# Altium PCB MD017A ISO-F28027F.PcbDoc (part 1 of 2)
Units mil, origin at the board's own origin, x right, y up, seen from the top; angles counter-clockwise.
Board outline 2600 x 2000 mil, 2 copper layers (Top, Bottom), stack 61.811 mil thick; 81 components, 98 nets, 369 pads, 191 vias.
Unrouted connection lines stored in the file: 2.
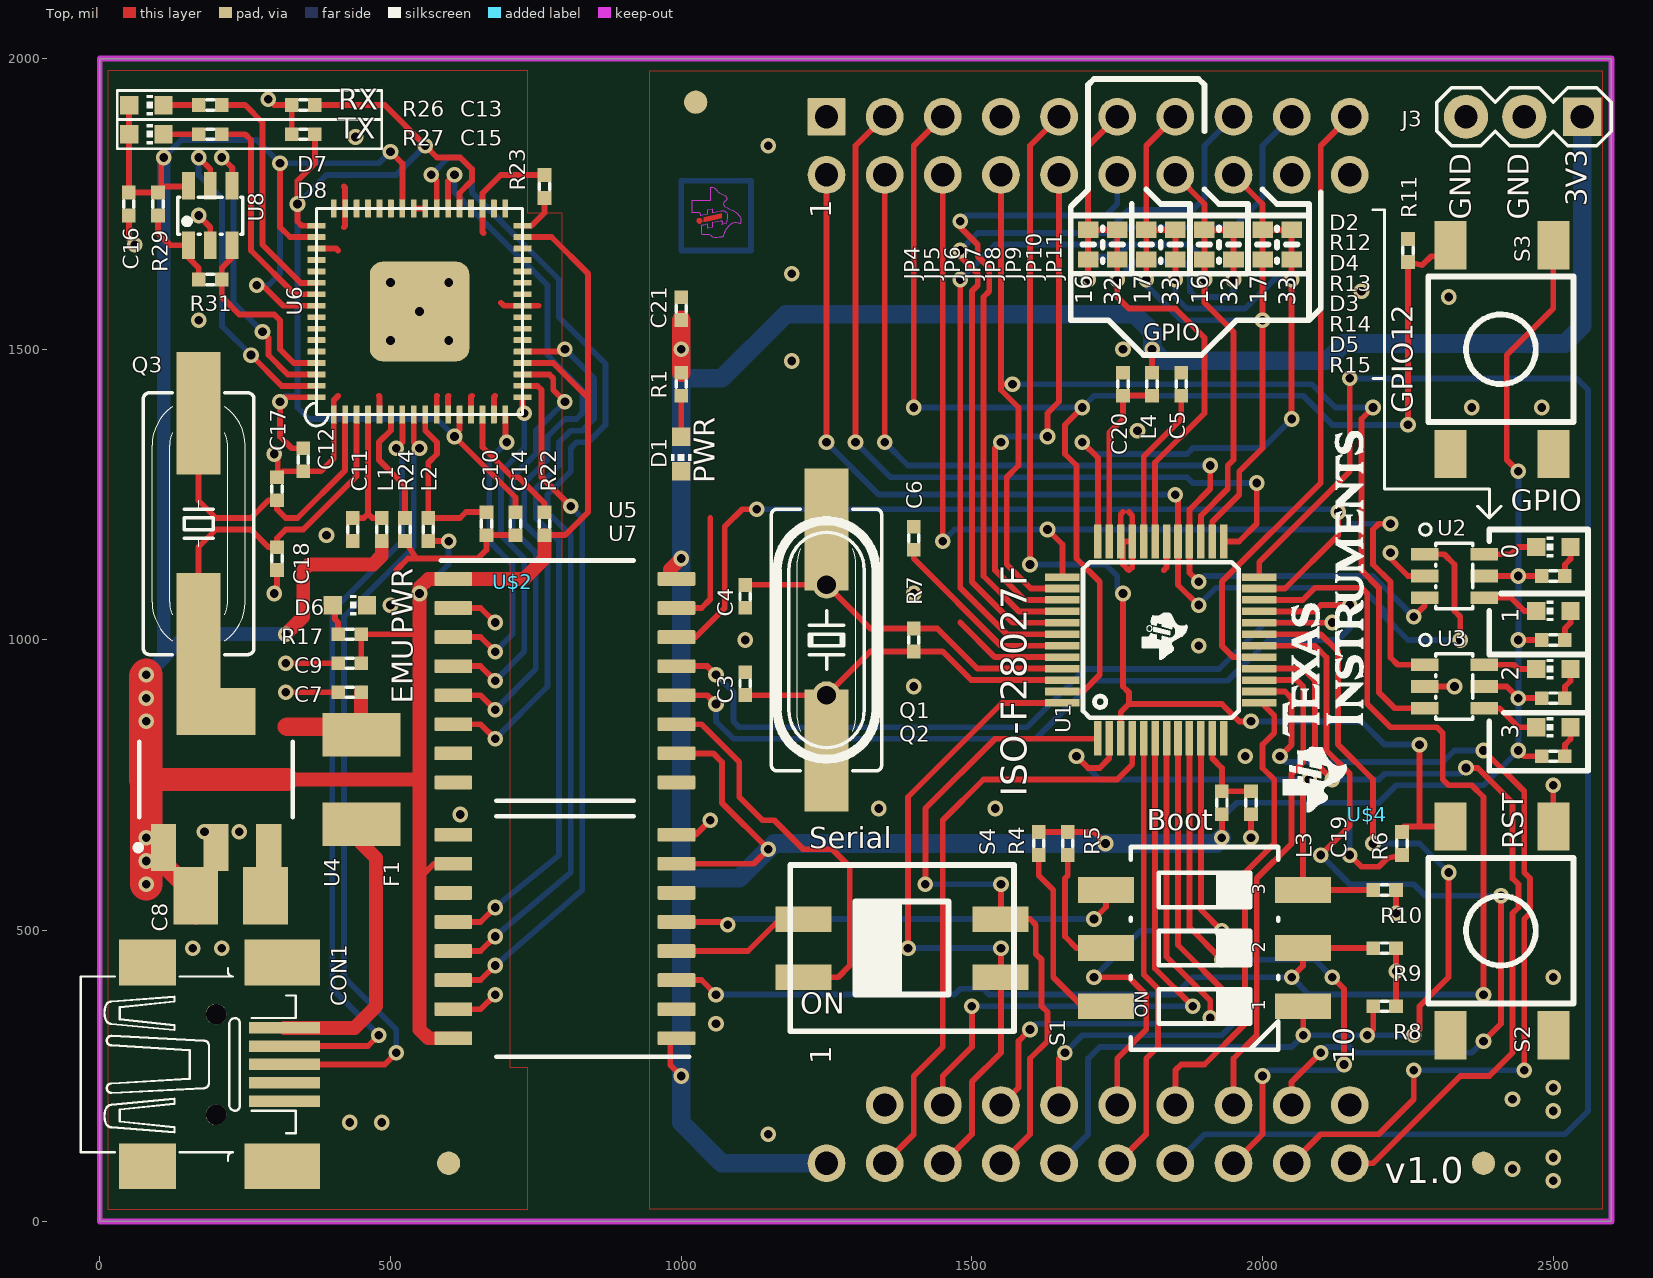
[diagram p0: Top view]
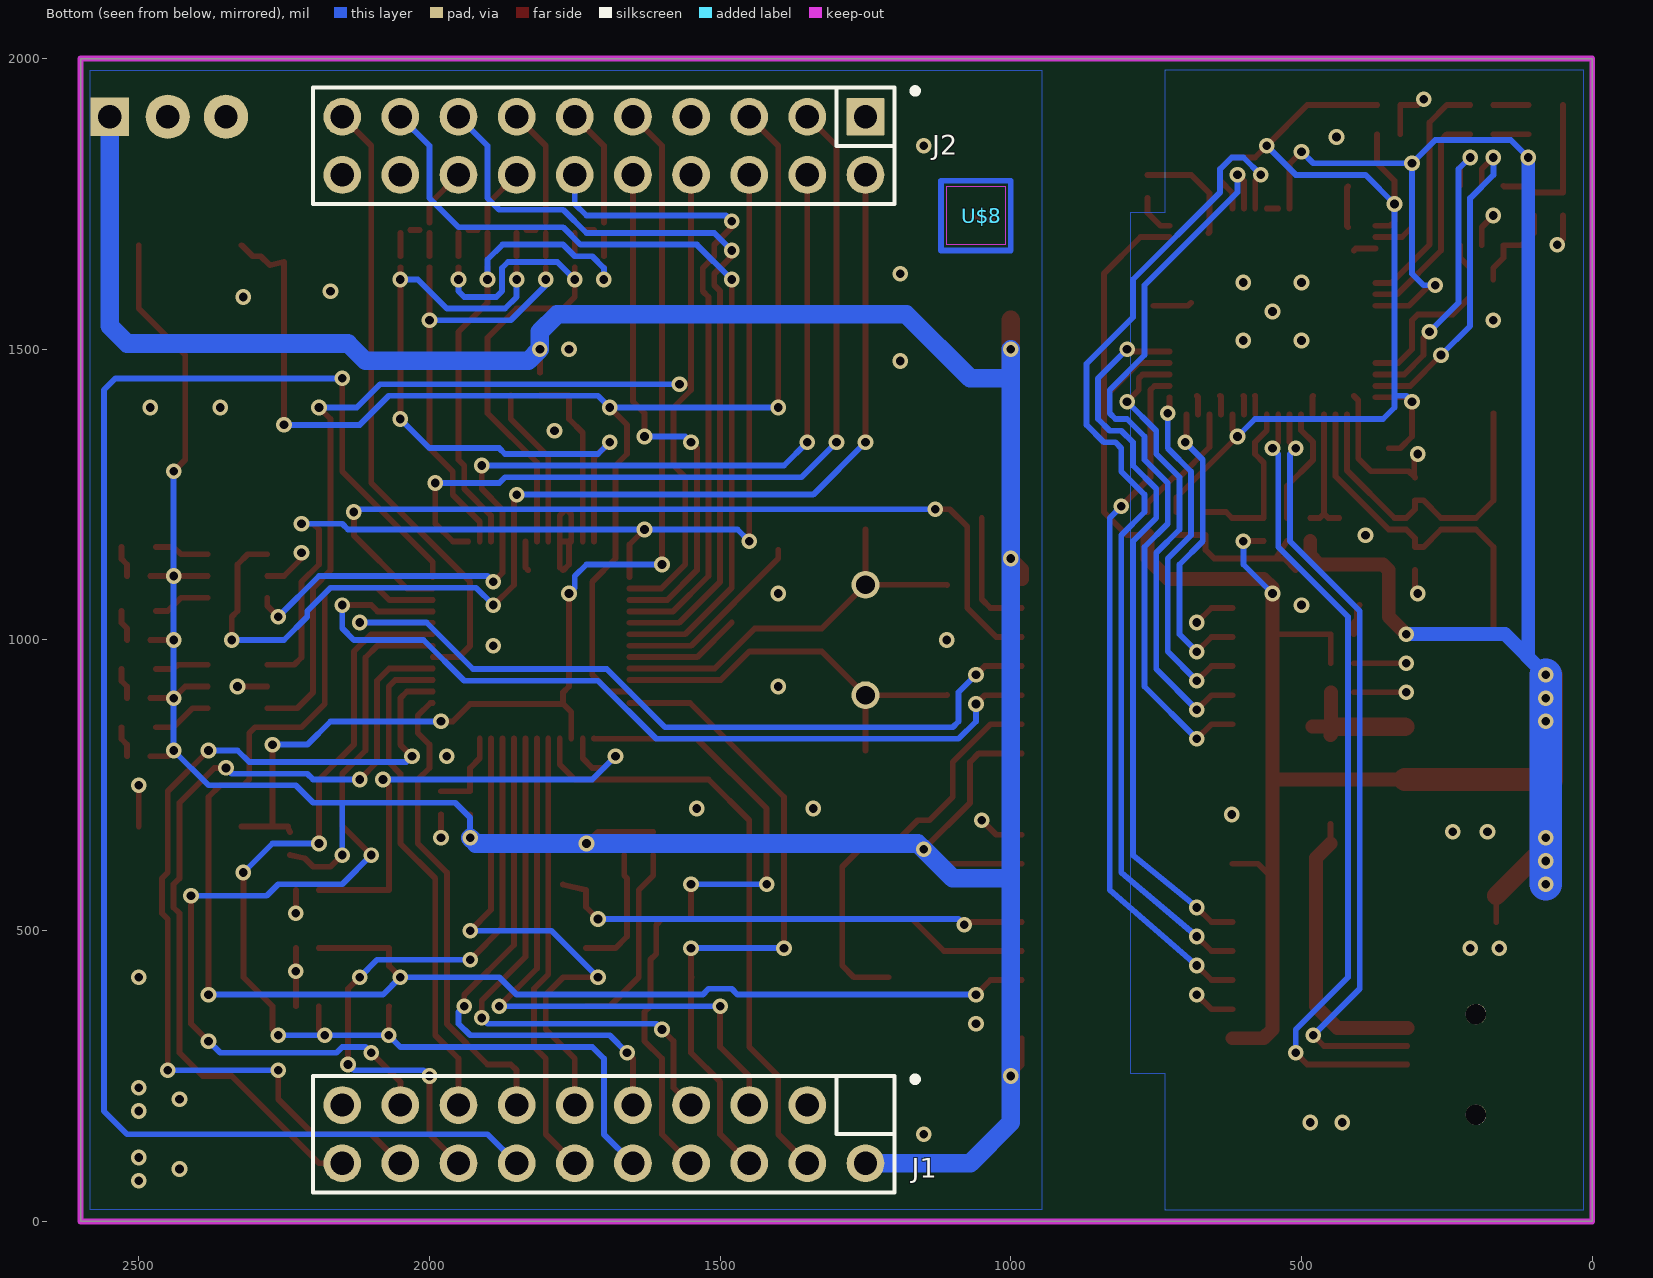
[diagram p1: Bottom view, seen from below]

## Layer stack, top to bottom
Top Solder: solder mask 0.4, Solder Resist, Dk 3.5
Top: signal copper 1.378
Dielectric 1: core 59.055, FR-4, Dk 4.8
Bottom: signal copper 1.378
Bottom Solder: solder mask 0.4, Solder Resist, Dk 3.5

## Board outline
0,0 0,2000 2600,2000 2600,0

## Design rules (kind name [scope] priority, off if disabled: settings)
Clearance [All] p1: gap=5 ignorepadtopadclearanceinfootprint=FALSE except(0: Arc-Hole Track-Hole SMDPad-Hole THPad-Hole Via-Hole Fill-Hole Poly-Hole Region-Hole Text-Hole; 11.5: Arc-Poly Track-Poly SMDPad-Poly THPad-Poly Via-Poly Fill-Poly Poly-Poly)
HoleSize HoleSize_1 [All] p1: absolutevalues=TRUE maxlimit=100000 minlimit=15 maxpercent=80.000 minpercent=20.000
HoleSize [All] p2: absolutevalues=TRUE maxlimit=100 minlimit=1 maxpercent=80.000 minpercent=20.000
HoleToHoleClearance mdViaViaSameLayer [All] p1: gap=8 allowstackedmicrovias=TRUE
HoleToHoleClearance [All] p2: gap=10 allowstackedmicrovias=TRUE
MinimumSolderMaskSliver [All] p1: minsoldermaskwidth=2.4
PasteMaskExpansion mlMinCreamFrame [All] p1: expansion=-10
PasteMaskExpansion [All] p2: expansion=0
PolygonConnect ThermalVias [IsVia] p1: connectstyle=Direct reliefconductorwidth=10 reliefentries=4 polygonreliefangle="90 Angle" airgapwidth=10
PolygonConnect [All] p2: connectstyle=Relief reliefconductorwidth=10 reliefentries=4 polygonreliefangle="90 Angle" airgapwidth=10
RoutingVias [All] p1: holewidth=28 width=50 viastyle="Through Hole" minholewidth=28 minwidth=50 maxholewidth=28 maxwidth=50
ShortCircuit Net-ties [HasFootprint('C0402')] p1: allowed=TRUE
ShortCircuit [All] p2: allowed=FALSE
SilkToSilkClearance [All] p1 off: silktosilkclearance=10
SilkToSolderMaskClearance [IsPad] p1 off: minsilkscreentomaskgap=10 clearancetoexposedcopper=TRUE
SolderMaskExpansion mlMinStopFrame [All] p1: expansion=1 istentingtop=FALSE
SolderMaskExpansion [All] p2: expansion=4 istentingtop=FALSE
Width Width_1 [All] p1: maxlimit=100000 minlimit=6 preferedwidth=10
Width [All] p2: maxlimit=10 minlimit=10 preferedwidth=10
23 further rules are at their usual default settings.

## Components (designator, comment, footprint, x,y, rotation, side; value= is the part's Value field where it differs from the comment)
C3 "36p" C0402#1 1110,925 r90 top
C4 "36p" C0402#1 1110,1075 r270 top
C5 "2.2u" C0402#1 1860,1440 r90 top
C6 "2.2u" C0402#1 1400,1175 r90 top
C7 "1u" C0402#1 430,910 r180 top
C8 "100u" B/3528-21R 225,560 r180 top
C9 "0.1u" C0402#1 430,960 r180 top
C10 "4.7u" C0402#1 665,1200 r270 top
C11 "4.7u" C0402#1 435,1190 r270 top
C12 "0.1u" C0402#1 350,1310 r270 top
C13 "0.1u" C0402#1 350,1920 r180 top
C14 "0.1u" C0402#1 715,1200 r270 top
C15 "3.3u" C0402#1 350,1870 r180 top
C16 "0.1u" C0402#1 50,1750 r270 top
C17 "36p" C0402#1 305,1260 r90 top
C18 "36p" C0402#1 305,1140 r270 top
C19 "2.2u" C0402#1 1980,720 r270 top
C20 "2.2u" C0402#1 1760,1440 r90 top
C21 "2.2u" C0402#1 1000,1570 r90 top
CON1 "MINI-USB-32005-201" 32005-201 200,270 r0 top
D1 "" CHIP-LED0603 1000,1320 r180 top
D2 "" CHIP-LED0603 2500,1160 r90 top
D3 "" CHIP-LED0603 2500,950 r90 top
D4 "" CHIP-LED0603 2500,1050 r90 top
D5 "" CHIP-LED0603 2500,850 r90 top
D6 "" CHIP-LED0603 430,1060 r270 top
D7 "" CHIP-LED0603 80,1920 r270 top
D8 "" CHIP-LED0603 80,1870 r270 top
F1 "500mA" L1812 450,760 r270 top
J1 "Comment" TSW-110-07-G-D#1 1700,150 r0 bottom
J2 "Comment" TSW-110-07-G-D#2 1700,1850 r0 bottom
J3 "" MA03-1 2450,1900 r180 top
JP4 "" C0402#2 1700,1680 r270 top
JP5 "" C0402#2 1750,1680 r270 top
JP6 "" C0402#2 1800,1680 r270 top
JP7 "" C0402#2 1850,1680 r270 top
JP8 "" C0402#2 1900,1680 r270 top
JP9 "" C0402#2 1950,1680 r270 top
JP10 "" C0402#2 2000,1680 r270 top
JP11 "" C0402#2 2050,1680 r270 top
L1 "" R0402 485,1190 r90 top
L2 "" R0402 565,1190 r90 top
L3 "" R0402 1930,720 r270 top
L4 "" R0402 1810,1440 r90 top
R1 "820" R0402 1000,1440 r90 top
R4 "820" R0402 1615,650 r90 top
R5 "820" R0402 1665,650 r90 top
R6 "2.2k" R0402 2240,650 r270 top
R7 "1M" R0402 1400,1000 r270 top
R8 "2.2k" R0402 2210,370 r180 top
R9 "2.2k" R0402 2210,470 r180 top
R10 "2.2k" R0402 2210,570 r180 top
R11 "10k" R0402 2250,1670 r90 top
R12 "330" R0402 2500,1110 r180 top
R13 "330" R0402 2500,1000 r180 top
R14 "330" R0402 2500,900 r180 top
R15 "330" R0402 2500,800 r180 top
R17 "820" R0402 430,1010 r0 top
R22 "1k" R0402 765,1200 r90 top
R23 "1k" R0402 765,1780 r90 top
R24 "12k" R0402 525,1190 r90 top
R26 "330" R0402 190,1920 r180 top
R27 "330" R0402 190,1870 r180 top
R29 "10k" R0402 100,1750 r90 top
R31 "2.2k" R0402 190,1620 r0 top
S1 "219-03" CTS-219-03 1900,470 r90 top
S2 "" FSMJSMA 2500,320 r180 top
S3 "" FSMJSMA 2500,1320 r180 top
S4 "" CTS-204-1 1380,470 r90 top
U1 "" PQFP48 1825,1000 r90 top
U2 "" SOT23-6-DBV 2330,1110 r270 top
U3 "" SOT23-6-DBV 2330,920 r270 top
U4 "TLV1117-33" SOT223 200,760 r90 top
U5 "Comment" DW0016B_HV 800,930 r0 top
U6 "" QFN64 550,1565 r90 top
U7 "Comment" DW0016B_HV 800,490 r180 top
U8 "93" SOT23-6 190,1730 r0 top
U$2 "" XL 2540,2110 r90 top locked
U$3 "" MSP430_LAB_TILOGO_SMALL 1050,1730 r270 bottom
U$4 "" STI_LOGO_LOGO16_TPLACE 2180,700 r90 top
U$8 "" MSP430_LAB_TILOGO_SMALL_TSTOP 1050,1730 r270 bottom

## Footprints (in the part's own frame and the unit in brackets; to place one, negate y for a bottom-side part, rotate by r counter-clockwise, add the part's x,y. Pads: shape width x height; smd on the part's side, far side on the other; paste and mask are expansions set on the pad)
32005-201 [mm] "32005-201"
  round 0.9 hole 0.9 paste-0.102: 1(0,-2.2) 1(0,2.2)
  rect 3.1x0.5 smd paste-0.102: 1(3,1.6) 2(3,0.8) 3(3,0) 4(3,-0.8) 5(3,-1.6)
  rect 2.5x2 smd paste-0.102: M1(-3,-4.45) M2(-3,4.45)
  rect 3.3x2 smd paste-0.102: M3(2.9,4.45) M4(2.9,-4.45)
  silkscreen extent -5.92,-4.2 3.48,4.2
B/3528-21R [mm] "B/3528-21R"
  rect 1.95x2.5 smd paste-0.102: +(1.525,0) -(-1.525,0)
C0402#1 [mil] "C0402"
  rect 23.62x23.62 smd paste-4: 1(-19.69,0) 2(19.69,0)
  silkscreen extent -6,-9 6,9
C0402#2 [mil] "C0402"
  rect 27.56x35.43 smd paste-4: 1(-25.59,0) 2(25.59,0)
  Top lines w10: 20,0 -20,0
  silkscreen extent 0,-10 0,10
CHIP-LED0603 [mil] "CHIP-LED0603"
  rect 31.5x31.5 smd paste-4: A(0,-29.53) C(0,29.53)
  silkscreen extent -18,0 18,12
CTS-204-1 [mil] "CTS-204-1"
  rect 44x96 smd paste-4: P$1(-50,-169.5) P$2(-50,169.5) P$3(50,-169.5) P$4(50,169.5)
  silkscreen extent -143,-192 143,192
CTS-219-03 [mil] "CTS-219-03"
  rect 44.49x96.06 smd paste-4: 1(-100,-169.29) 2(0,-169.29) 3(100,-169.29) 4(100,169.29) 5(0,169.29) 6(-100,169.29)
  silkscreen extent -175,-127 174,127
DW0016B_HV [mm] "High voltage version of DW0016B"
  rrect17% 1.65x0.6 smd paste-0.102: 1(-4.875,4.445) 2(-4.875,3.175) 3(-4.875,1.905) 4(-4.875,0.635) 5(-4.875,-0.635) 6(-4.875,-1.905) 7(-4.875,-3.175) 8(-4.875,-4.445) 9(4.875,-4.445) 10(4.875,-3.175) 11(4.875,-1.905) 12(4.875,-0.635) 13(4.875,0.635) 14(4.875,1.905) 15(4.875,3.175) 16(4.875,4.445)
  silkscreen extent -5.43,-5.25 3,5.25, body extent -5.14,-5.13 5.14,5.13, height 2.5
FSMJSMA [mil] "FSMJSMA"
  rect 55x83 smd paste-4: P$1(0,0) P$2(0,-359) P$3(177,0) P$4(177,-359)
  silkscreen extent -35,-305 215,-55
L1812 [mil] "L1812"
  rect 74.8x133.86 smd paste-4: 1(-76.77,0) 2(76.77,0)
MA03-1 [mil] "MA03-1"
  rect 66x66 hole 40 paste-4: 1(-100,0)
  round 76 hole 40 paste-4: 2(0,0) 3(100,0)
  silkscreen extent -150,-50 150,50
MSP430_LAB_TILOGO_SMALL [mil] "MSP430_LAB_TILOGO_SMALL"
  Bottom region: 3.06,11.33 -3.71,-19.72 4.8,-19.72 11.79,11.39 3.06,11.28
  Bottom region: 4.42,20.06 5.04,21.29 5.39,21.62 5.71,21.94 6.32,22.24 7.28,22.86 8.94,22.97 10.78,22.89 11.41,22.59 12.08,21.93 12.72,21.26 13,20.96 13.34,20.3 13.66,19.37 13.7,17.47 13.39,16.22 12.68,15.24 11.41,14.23 10.47,13.92 8.75,13.81 7.27,13.96 6.01,14.61 5.35,15.28 4.74,15.93 4.44,16.83 4.3,18.57 4.41,20.06
  Bottom keep-out region: -26.31,31.2 -26.37,20.33 -26.31,9.6 -26.31,-1.13 -45.34,-1.08 -49.02,-1.03 -49.02,-2.87 -48.37,-4.66 -47.45,-6.93 -46.15,-8.56 -44.47,-10.19 -42.63,-12.08 -41.33,-13.33 -40.41,-14.25 -39.43,-15.33 -38.51,-16.8 -37.54,-19.13 -36.56,-21.24 -35.69,-23.25 -34.93,-24.55 -33.41,-26.45 -31.74,-27.69 -31.03,-28.07 -29.35,-28.4 -27.29,-28.07 -26.59,-27.42 -25.88,-26.83 -24.74,-25.47 -23.44,-24.17 -22.52,-23.25 -21.87,-22.98 -19.92,-22.65 -17.97,-22.87 -16.61,-23.85 -15.37,-25.09 -13.2,-29 -11.9,-31.59 -10.98,-33.76 -10.11,-36.04 -8.75,-38.64 -7.51,-41.08 -5.56,-43.95 -3.01,-46.94 -0.79,-48.83 1.54,-50.51 3.17,-51.43 4.74,-52.09 6.26,-52.35 9.08,-52.57 11.03,-52.41 12.44,-52.09 13.31,-51.76 13.96,-51.33 14.12,-50.84 13.63,-49.32 13.04,-47.1 12.65,-44.98 12.44,-43.2 12.6,-41.73 12.98,-39.73 13.63,-38.21 14.23,-36.96 15.26,-35.28 16.5,-33.76 17.8,-32.25 19.16,-30.94 21,-29.37 22.85,-28.02 24.58,-27.1 26.1,-26.18 27.4,-25.53 29.67,-24.28 32.28,-23.25 33.79,-22.54 35.47,-21.95 36.45,-21.52 36.78,-20.97 36.99,-19.72 37.31,-17.78 37.64,-15.44 38.02,-12.03 38.24,-9.81 38.07,-7.85 37.64,-4.66 37.43,-4.39 36.45,-3.79 35.37,-2.98 34.77,-1.84 33.9,-0.11 33.25,2.12 32.87,6.13 33.14,9.7 33.41,11.87 33.25,13.34 32.6,13.66 31.35,13.99 29.46,14.26 27.4,14.53 23.66,14.91 20.3,15.02 16.29,14.96 15.96,13.66 15.37,10.63 14.72,7.86 14.33,6.18 14.12,4.88 21.06,4.88 20.78,3.85 18.83,-4.66 11.9,-4.66 9.19,-17.13 9.13,-19.72 9.51,-20.05 10.11,-20.32 12.76,-20.27 14.61,-20.05 12.76,-27.1 12.11,-28.4 10.22,-28.94 7.99,-29.48 4.8,-30.13 1.81,-30.51 -1.44,-30.19 -2.41,-29.92 -4.2,-29 -5.5,-27.59 -6.53,-26.34 -7.13,-24.77 -7.45,-22.6 -7.4,-19.62 -7.13,-17.99 -5.5,-10.19 -4.47,-5.85 -4.42,-4.66 -11.19,-4.6 -9.08,4.88 -2.09,4.88 0.24,16.26 -1.93,16.48 -3.55,17.13 -4.8,17.78 -4.85,31.22 -26.42,31.28
MSP430_LAB_TILOGO_SMALL_TSTOP [mil] "MSP430_LAB_TILOGO_SMALL_TSTOP"
PQFP48 [mil] "PQFP48"
  rect 59.06x13 smd paste-4: 1(-169.29,108.27) 2(-169.29,88.58) 3(-169.29,68.9) 4(-169.29,49.21) 5(-169.29,29.53) 6(-169.29,9.84) 7(-169.29,-9.84) 8(-169.29,-29.53) 9(-169.29,-49.21) 10(-169.29,-68.9) 11(-169.29,-88.58) 12(-169.29,-108.27) 25(169.29,-108.27) 26(169.29,-88.58) 27(169.29,-68.9) 28(169.29,-49.21) 29(169.29,-29.53) 30(169.29,-9.84) 31(169.29,9.84) 32(169.29,29.53) 33(169.29,49.21) 34(169.29,68.9) 35(169.29,88.58) 36(169.29,108.27)
  rect 13x59.06 smd paste-4: 13(-108.27,-169.29) 14(-88.58,-169.29) 15(-68.9,-169.29) 16(-49.21,-169.29) 17(-29.53,-169.29) 18(-9.84,-169.29) 19(9.84,-169.29) 20(29.53,-169.29) 21(49.21,-169.29) 22(68.9,-169.29) 23(88.58,-169.29) 24(108.27,-169.29) 37(108.27,169.29) 38(88.58,169.29) 39(68.9,169.29) 40(49.21,169.29) 41(29.53,169.29) 42(9.84,169.29) 43(-9.84,169.29) 44(-29.53,169.29) 45(-49.21,169.29) 46(-68.9,169.29) 47(-88.58,169.29) 48(-108.27,169.29)
  silkscreen extent -134,-134 134,134
QFN64 [mil] "QFN64"
  rrect25% 31.5x9.84 smd paste-4: P$1(-177.17,147.64) P$2(-177.17,127.95) P$3(-177.17,108.27) P$4(-177.17,88.58) P$5(-177.17,68.9) P$6(-177.17,49.21) P$7(-177.17,29.53) P$8(-177.17,9.84) P$9(-177.17,-9.84) P$10(-177.17,-29.53) P$11(-177.17,-49.21) P$12(-177.17,-68.9) P$13(-177.17,-88.58) P$14(-177.17,-108.27) P$15(-177.17,-127.95) P$16(-177.17,-147.64) P$33(177.17,-147.64) P$34(177.17,-127.95) P$35(177.17,-108.27) P$36(177.17,-88.58) P$37(177.17,-68.9) P$38(177.17,-49.21) P$39(177.17,-29.53) P$40(177.17,-9.84) P$41(177.17,9.84) P$42(177.17,29.53) P$43(177.17,49.21) P$44(177.17,68.9) P$45(177.17,88.58) P$46(177.17,108.27) P$47(177.17,127.95) P$48(177.17,147.64)
  rrect25% 9.84x31.5 smd paste-4: P$17(-147.64,-177.17) P$18(-127.95,-177.17) P$19(-108.27,-177.17) P$20(-88.58,-177.17) P$21(-68.9,-177.17) P$22(-49.21,-177.17) P$23(-29.53,-177.17) P$24(-9.84,-177.17) P$25(9.84,-177.17) P$26(29.53,-177.17) P$27(49.21,-177.17) P$28(68.9,-177.17) P$29(88.58,-177.17) P$30(108.27,-177.17) P$31(127.95,-177.17) P$32(147.64,-177.17) P$49(147.64,177.17) P$50(127.95,177.17) P$51(108.27,177.17) P$52(88.58,177.17) P$53(68.9,177.17) P$54(49.21,177.17) P$55(29.53,177.17) P$56(9.84,177.17) P$57(-9.84,177.17) P$58(-29.53,177.17) P$59(-49.21,177.17) P$60(-68.9,177.17) P$61(-88.58,177.17) P$62(-108.27,177.17) P$63(-127.95,177.17) P$64(-147.64,177.17)
  rrect25% 171.26x171.26 smd paste-4: TH(0,0)
  silkscreen extent -197,-177 177,197
R0402 [mil] "R0402"
  rect 23.62x23.62 smd paste-4: 1(-19.69,0) 2(19.69,0)
  silkscreen extent -6,-9 6,9
SOT23-6 [mil] "SOT23-6"
  rect 21.65x47.24 smd paste-4: 1(-37.4,-51.18) 2(0,-51.18) 3(37.4,-51.18) 4(37.4,51.18) 5(0,51.18) 6(-37.4,51.18)
  silkscreen extent -56,-32 56,32
SOT23-6-DBV [mil] "SOT23-6-DBV"
  rect 21.65x47.24 smd paste-4: 1(-37.4,-51.18) 2(0,-51.18) 3(37.4,-51.18) 4(37.4,51.18) 5(0,51.18) 6(-37.4,51.18)
  silkscreen extent -90,-60 56,32
SOT223 [mm] "SOT223, 4-Leads, Body 6,50x7,10mm (avg), Pitch 2,30mm, IPC Medium Density"
  rect 2.05x1.1 smd: 1(-2.975,2.3) 2(-2.975,0) 3(-2.975,-2.3)
  rect 2.05x3.45 smd: 4(2.975,0)
  silkscreen extent -3.1,-3.35 1.65,3.52, body extent -3.42,-3.22 3.58,3.28, height 1.7
STI_LOGO_LOGO16_TPLACE [mil] "STI_LOGO_LOGO16_TPLACE"
  silkscreen extent 3,6 660,145
TSW-110-07-G-D#1 [mm] "Samtec 100mil, 2x10, 230 mil above insulator"
  round 1.65 hole 1.016 paste-0.102: 2(-11.43,1.27) 3(-8.89,-1.27) 4(-8.89,1.27) 5(-6.35,-1.27) 6(-6.35,1.27) 7(-3.81,-1.27) 8(-3.81,1.27) 9(-1.27,-1.27) 10(-1.27,1.27) 11(1.27,-1.27) 12(1.27,1.27) 13(3.81,-1.27) 14(3.81,1.27) 15(6.35,-1.27) 16(6.35,1.27) 17(8.89,-1.27) 18(8.89,1.27) 19(11.43,-1.27) 20(11.43,1.27)
  silkscreen extent -13.72,-2.54 12.7,2.54, body extent -12.7,-2.54 12.7,2.54, height 8.38
TSW-110-07-G-D#2 [mm] "Samtec 100mil, 2x10, 230 mil above insulator"
  rrect6% 1.65x1.65 hole 1.016 paste-0.102: 1(-11.43,-1.27)
  round 1.65 hole 1.016 paste-0.102: 2(-11.43,1.27) 3(-8.89,-1.27) 4(-8.89,1.27) 5(-6.35,-1.27) 6(-6.35,1.27) 7(-3.81,-1.27) 8(-3.81,1.27) 9(-1.27,-1.27) 10(-1.27,1.27) 11(1.27,-1.27) 12(1.27,1.27) 13(3.81,-1.27) 14(3.81,1.27) 15(6.35,-1.27) 16(6.35,1.27) 17(8.89,-1.27) 18(8.89,1.27) 19(11.43,-1.27) 20(11.43,1.27)
  silkscreen extent -13.72,-2.54 12.7,2.54, body extent -12.7,-2.54 12.7,2.54, height 8.38
XL [mil] "XL"
  round 48 hole 32 paste-4: 1(-1015,1290) 2(-1205,1290)
  rect 210x76 smd paste-4: 1(-920,1290) 1(-720,2370) 2(-1300,1290) 2(-1100,2370)
  silkscreen extent -1335,1195 -685,2465

## Part data
C3 C4 C5 C6 C7 C9 C10 C11 C12 C13 C14 C15 C16 C17 C18 C19 C20 C21: library part C-USC0402, "CAPACITOR, American symbol"
C8: library part CPOL-USB/3528-21R, "POLARIZED CAPACITOR, American symbol"
CON1: "MINI USB-B Conector   Source: www.cypressindustries.com"
D1 D2 D3 D4 D5 D6 D7 D8: library part LEDCHIP-LED0603, "LED   OSRAM: - CHIPLED LG R971, LG N971, LY N971, LG Q971, LY Q971, LO R971, LY R971 LH N974, LH R974 LS Q976, LO Q976, LY Q976 LO Q996 - Hyper CHIPLED LW Q18S LB Q993, LB Q99A, LB R99A - SideLED LS A670, LO A670, LY A670, LG A670, LP A670 LB A673, LV A673, LT A673, LW A673 LH A674 LY A675 LS A676, LA A676, LO A676, LY A676, LW A676 LS A679, LY A679, LG A679 -  Hyper Micro SIDELED® LS Y876, LA Y876, LO Y876, LY Y876 LT Y87S - SmartLED LW L88C, LW L88S LB L89C, LB L89S, LG L890 LS L89K, LO L89K, LY L89K LS L896, LA L896, LO L896, LY L896 - TOPLED LS T670, LO T670, LY T670, LG T670, LP T670 LSG T670, LSP T670, LSY T670, LOP T670, LYG T670 LG T671, LOG T671, LSG T671 LB T673, LV T673, LT T673, LW T673 LH T674 LS T676, LA T676, LO T676, LY T676, LB T676, LH T676, LSB T676, LW T676 LB T67C, LV T67C, LT T67C, LS T67K, LO T67K, LY T67K, LW E67C LS E67B, LA E67B, LO E67B, LY E67B, LB E67C, LV E67C, LT E67C LW T67C LS T679, LY T679, LG T679 LS T770, LO T770, LY T770, LG T770, LP T770 LB T773, LV T773, LT T773, LW T773 LH T774 LS E675, LA E675, LY E675, LS T675 LS T776, LA T776, LO T776, LY T776, LB T776 LHGB T686 LT T68C, LB T68C - Hyper Mini TOPLED® LB M676 - Mini TOPLED Santana® LG M470 LS M47K, LO M47K, LY M47K    Source: http://www.osram.convergy.de   LUXEON: - LUMILED® LXK2-PW12-R00, LXK2-PW12-S00, LXK2-PW14-U00, LXK2-PW14-V00 LXK2-PM12-R00, LXK2-PM12-S00, LXK2-PM14-U00 LXK2-PE12-Q00, LXK2-PE12-R00, LXK2-PE12-S00, LXK2-PE14-T00, LXK2-PE14-U00 LXK2-PB12-K00, LXK2-PB12-L00, LXK2-PB12-M00, LXK2-PB14-N00, LXK2-PB14-P00, LXK2-PB14-Q00 LXK2-PR12-L00, LXK2-PR12-M00, LXK2-PR14-Q00, LXK2-PR14-R00 LXK2-PD12-Q00, LXK2-PD12-R00, LXK2-PD12-S00 LXK2-PH12-R00, LXK2-PH12-S00 LXK2-PL12-P00, LXK2-PL12-Q00, LXK2-PL12-R00    Source: www.luxeon.com   KINGBRIGHT:   KA-3528ASYC Source: www.kingbright.com"
F1: library part L-EUL1812, "INDUCTOR, European symbol"
J1 J2: library part MA10-1, "PIN HEADER"
J3: library part MA03-1, "PIN HEADER"
JP4 JP5 JP6 JP7 JP8 JP9 JP10 JP11: library part JP1ECUT, "JUMPER"
L1 L2 L3 L4: library part L-US0402, "INDUCTOR, American symbol"
R1 R4 R5 R6 R7 R8 R9 R10 R11 R12 R13 R14 R15 R17 R22 R23 R24 R26 R27 R29 R31: library part R-US_R0402, "RESISTOR, American symbol"
S1: library part 219-03*, "Surface Mount DIP Switch Series 219 SMT   CTS Electronic Components Sourc: www.ctscorp.com"
S2 S3: library part FSMJSMA
S4: library part 204-1*
U1: library part TMS320F28027PT
U2 U3: library part SN74LVC2G07
U6: library part FT2232H
U8: library part 93*, "Serial EPROM   1 K/2 K/4 K, low voltage, Microwire"
U$2: library part XL
U$3: library part MSP430_LAB_TILOGO_SMALL
U$4: library part STI_LOGO_LOGO16_TPLACE
U$8: library part MSP430_LAB_TILOGO_SMALL_TSTOP

## Free pads (board coordinates)
  round 40 smd mask+20: FID(600,100) FID(1025,1925) FID(2380,100)

## Via types
v1: diameter 27/27 (per signal layer), hole 15, Top to Bottom, tented both sides, 191 vias

## Nets (pads, with @x,y where several pads share a name; then routed paths per layer and width w, separated by ;. In a path a pad name is that pad's centre, name@x,y a point inside that pad or via, vN(x,y) a via of type N, cw(c..) or ccw(c..) an arc to the next point about the centre after c; other vN are vias at no path point)
+3V3: C21.1 J1.2 J3.1 L3.2 L4.2 R1.2 R4.2 R5.2 R6.2 R12.2 R13.2 R14.2 R15.2 S3.P$2 U2.5 U3.5 U5.10 U5.16 U7.1 U7.7 | length 7469.8
  Top w10: U7.1@981.1,315 981.1,268.9 v1(1000,250) ; U7.7@981.1,615 1125,615 v1(1150,640) 1070,720 1070,790 1055,805 U5.10@981.1,805 ; R4.2@1615,669.69 R5.2@1665,669.69 1710.32,669.69 v1(1730,650) ; L4.2@1810,1459.69 v1(1810,1500) ; v1(1930,660) L3.2@1930,700.31 ; v1(2150,630) 2170,610 2200,610 2214.41,624.41 R6.2@2240,630.31 ; U3.5@2381.18,920 2420,920 v1(2440,900) R14.2@2480.31,900 ; U2.5@2381.18,1110 v1(2440,1110) R12.2@2480.31,1110 ; 2430,1300 v1(2440,1290) 2420,1310 2420,1490 2500,1570 S3.P$2@2500,1679 ; v1(2440,810) 2450,800 R15.2@2480.31,800 ; v1(2440,1000) R13.2@2480.31,1000
  Top w24: U5.16@981.1,1105 981.1,1121.1 v1(1000,1140)
  Top w32: R1.2@1000,1459.69 v1(1000,1500) C21.1@1000,1550.31
  Bottom w10: v1(1930,660) 1930,694.41 1955.59,720 2150,720 ; v1(2150,630) 2150,720 ; v1(2440,1290) v1(2440,1110) v1(2440,1000) v1(2440,900) v1(2440,810) 2380,750 2230,750 2200,720 2150,720
  Bottom w32: v1(1000,1500) 1000,1450 ; J1.2@1250,100 1070,100 1000,170 v1(1000,250) 1000,590 ; v1(1930,660) 1920,650 v1(1730,650) 1160,650 v1(1150,640) 1100,590 1000,590 ; J3.1@2550,1900 2550,1540 2520,1510 2140,1510 2110,1480 1830,1480 v1(1810,1500) 1810,1530 1780,1560 1180,1560 1070,1450 1000,1450 ; 1000,590 v1(1000,1140) 1000,1450
+5V: 
ADCINA0: J1.11 U1.10 | length 911.9
  Top w10: v1(1710,420) 1770,420 1800,390 1800,330 1750,280 J1.11@1750,200 ; U1.10@1893.9,830.71 1893.9,536.1 v1(1930,500)
  Bottom w10: v1(1710,420) 1790,500 v1(1930,500)
ADCINA1: J1.9 U1.8 | length 935.1
  Top w10: J1.9@1650,200 1650,280 v1(1660,290) ; U1.8@1854.53,830.71 1854.53,475.47 1940,390 v1(1940,370)
  Bottom w10: v1(1660,290) 1690,320 1930,320 1950,340 1950,360 v1(1940,370)
ADCINA2: J1.16 U1.9 | length 1083.5
  Top w10: U1.9@1874.21,830.71 1874.21,505.79 v1(1930,450) ; J1.16@1950,100 2000,150 v1(2000,250) ; v1(2120,420) 2140,400 v1(2140,270)
  Bottom w10: v1(1930,450) 2090,450 v1(2120,420) ; v1(2000,250) 2010,260 2130,260 v1(2140,270)
ADCINA3: J1.7 U1.7 | length 980.8
  Top w10: J1.7@1550,200 1580,230 1580,310 v1(1600,330) ; U1.7@1834.84,830.71 1834.84,455.16 1910,380 v1(1910,350)
  Bottom w10: v1(1600,330) 1610,340 1900,340 v1(1910,350)
ADCINA4: J1.12 U1.5 | length 769.9
  Top w10: J1.12@1750,100 1800,150 1800,280 1820,300 1820,400 1795.47,424.53 U1.5@1795.47,830.71
ADCINA6: J1.4 U1.4 | length 1041.8
  Top w10: J1.4@1350,100 1400,150 1400,250 1450,300 1450,690 1520,760 1750,760 1775.79,785.79 U1.4@1775.79,830.71
ADCINA7: J1.5 U1.6 | length 1058.3
  Top w10: J1.5@1450,200 1450,250 1500,300 v1(1500,370) ; U1.6@1815.16,830.71 1815.16,434.84 v1(1880,370)
  Bottom w10: v1(1500,370) v1(1880,370)
ADCINB1: J1.13 U1.13 | length 815.1
  Top w10: J1.13@1850,200 1850,260 1860,270 1900,270 1970,340 1970,600 2020,650 2020,760 2000,780 2000,820 2020,840 2020,870 1998.27,891.73 U1.13@1994.29,891.73
ADCINB2: J1.18 U1.14 | length 1614
  Top w10: U1.14@1994.29,911.42 2038.58,911.42 2050,900 2050,820 v1(2030,800) ; J1.18@2050,100 2100,150 2200,150 2260,210 v1(2260,260) ; v1(2380,810) 2450,740 2450,600 2460,590 2460,530 2450,520 v1(2450,260)
  Bottom w10: v1(2030,800) 2040,790 2310,790 2330,810 v1(2380,810) ; v1(2260,260) v1(2450,260)
ADCINB3: J1.15 U1.15 | length 850
  Top w10: J1.15@1950,200 1950,280 1990,320 1990,590 2050,650 2050,770 2070,790 2070,920 2058.9,931.1 U1.15@1994.29,931.1
ADCINB4: J1.20 U1.16 | length 1426.9
  Top w10: U1.16@1994.29,950.79 2069.21,950.79 2090,930 2090,790 v1(2120,760) ; J1.20@2150,100 2190,100 2340,250 2390,250 2430,290 2430,530 2440,540 2440,580 2430,590 2430,720 2370,780 v1(2350,780)
  Bottom w10: v1(2120,760) 2200,760 2210,770 2340,770 v1(2350,780)
ADCINB6: J2.19 U1.17 | length 1073.5
  Top w10: U1.17@1994.29,970.47 1949.53,970.47 1930,990 1930,1100 2100,1270 2100,1850 J2.19@2150,1900
ADCINB7: J1.17 U1.18 | length 1510
  Top w10: U1.18@1994.29,990.16 2089.84,990.16 2110,970 2110,810 2150,770 2150,680 v1(2100,630) ; J1.17@2050,200 2050,240 v1(2100,290) ; v1(2380,310) 2410,340 v1(2410,560)
  Bottom w10: v1(2100,290) 2110,300 2150,300 2160,290 2360,290 v1(2380,310) ; v1(2100,630) 2150,580 2260,580 2280,560 v1(2410,560)
AGND: C7.2 C8.- C9.2 C10.2 C11.2 C12.2 C13.2 C14.2 C15.2 C16.2 C17.2 C18.2 CON1.5 D6.C R23.2 R24.1 U4.1 U5.2 U5.8 U6.P$1 U6.P$5 U6.P$10 U6.P$11 U6.P$13 U6.P$15 U6.P$25 U6.P$35 U6.P$47 U6.P$51 U6.TH U7.9 U7.15 U8.2 | length 1649.3
  Top w10: C16.2@50,1730.31 50,1690 v1(60,1680) ; v1(170,1730) 190,1710 U8.2@190,1678.82 ; v1(290,1930) 300,1920 C13.2@330.31,1920 C15.2@330.31,1870 ; v1(300,1080) 305,1085 C18.2@305,1120.31 ; v1(300,1320) 306.18,1313.82 306.18,1284.41 C17.2@305,1279.69 315.63,1290.31 C12.2@350,1290.31 380.32,1290.31 402.36,1312.36 U6.P$1@402.36,1387.83 402.36,1412.36 410,1420 ; v1(320,910) C7.2@410.31,910 ; v1(320,960) C9.2@410.31,960 ; U6.P$51@372.83,1673.27 406.73,1673.27 410,1670 ; 420,1710 422.05,1712.05 U6.P$47@422.05,1742.17 422.05,1777.95 420,1780 ; 480,1420 481.1,1418.9 U6.P$5@481.1,1387.83 ; 510,1120 530,1140 545,1140 ; R24.1@525,1170.31 545,1140 ; U6.P$10@579.53,1387.83 579.53,1419.53 580,1420 ; U6.P$11@599.21,1387.83 599.21,1419.21 600,1420 ; U7.15@618.9,365 655,365 v1(680,390) ; U5.2@618.9,1055 655,1055 v1(680,1030) ; U6.P$13@638.58,1387.83 638.58,1418.58 640,1420 ; 660,1700 658.27,1701.73 U6.P$35@658.27,1742.17 658.27,1768.27 689.69,1799.69 R23.2@765,1799.69 ; U6.P$15@677.95,1387.83 677.95,1417.95 680,1420 ; 690,1580 695.16,1574.84 U6.P$25@727.17,1574.84 754.84,1574.84 ; C14.2@715,1180.31 C10.2@665,1180.31 665,1155 650,1140 545,1140
  other v1: 430,170 485,170 160,470 210,470 180,670 240,670 620,700 500,1060 390,1180 500,1515 600,1515 170,1550 550,1565 500,1615 600,1615 440,1865
D+: CON1.3 U6.P$8 | length 1393.2
  Top w10: CON1.3@318.11,270 490,270 v1(510,290) ; U6.P$8@540.16,1387.83 540.16,1339.84 v1(550,1330)
  Bottom w10: v1(510,290) 510,330 420,420 420,1040 540,1160 540,1320 v1(550,1330)
D-: CON1.2 U6.P$7 | length 1328.7
  Top w10: CON1.2@318.11,301.5 461.5,301.5 v1(480,320) ; v1(510,1330) 520.47,1340.47 U6.P$7@520.47,1387.83
  Bottom w10: v1(480,320) 400,400 400,1050 520,1170 520,1320 v1(510,1330)
FTDI_1V8: C12.1 C13.1 C14.1 C15.1 U6.P$12 U6.P$37 U6.P$49 U6.P$64 | length 1916.2
  Top w10: C12.1@350,1329.69 330.32,1329.69 310,1350 v1(310,1410) 317.36,1417.36 U6.P$64@372.83,1417.36 ; C15.1@369.69,1870 370,1869.69 370,1820 340,1790 v1(340,1750) 340,1720 347.36,1712.64 U6.P$49@372.83,1712.64 ; C13.1@369.69,1920 490,1920 v1(560,1850) 580,1830 620,1830 640,1810 640,1790 618.9,1768.9 U6.P$37@618.9,1742.17 ; U6.P$12@618.9,1387.83 618.9,1361.1 v1(610,1350) 715,1245 C14.1@715,1219.69
  Bottom w10: v1(310,1410) 320,1420 340,1420 ; v1(560,1850) 510,1800 390,1800 v1(340,1750) 340,1420 ; v1(610,1350) 580,1380 360,1380 340,1400 340,1420
FTDI_3V3: C8.+ C9.1 C16.1 D7.A D8.A L1.1 L2.1 R17.2 R22.1 R29.2 U4.2 U4.4 U5.1 U6.P$20 U6.P$31 U6.P$42 U6.P$50 U6.P$56 U7.10 U7.16 U8.6 | length 7038.4
  Top w10: D7.A@50.47,1920 D8.A@50.47,1870 50,1869.53 C16.1@50,1769.69 R29.2@100,1769.69 R29.2@105.59,1780 ; v1(110,1830) 105.59,1825.59 R29.2@105.59,1780 ; U8.6@152.6,1781.18 151.42,1780 R29.2@105.59,1780 ; C8.+@164.96,514.45 C8.+@164.96,560 ; v1(270,1610) 280,1610 315.16,1574.84 U6.P$56@372.83,1574.84 ; v1(310,1820) 310,1710 327.05,1692.95 U6.P$50@372.83,1692.95 ; C9.1@449.69,960 R17.2@449.69,1010 550,1010 ; v1(500,1840) 520.47,1819.53 U6.P$42@520.47,1742.17 ; 545.59,835.59 550,840 ; 550,570 555,575 ; 550,590 575,615 U7.10@618.9,615 ; L2.1@565,1170.31 599.69,1170.31 v1(600,1170) ; U6.P$20@727.17,1476.42 780,1476.42 840,1416.42 ; U6.P$31@727.17,1692.95 777.05,1692.95 840,1630 840,1416.42 ; R22.1@765,1180.31 800.32,1180.31 840,1220 840,1416.42
  Top w24: v1(320,1010) 350,1040 350,1120 360,1130 470,1130 485,1145 L1.1@485,1170.31 ; 322,760 550,760 ; U7.16@618.9,315 565,315 550,330 550,570 550,590 550,760 ; R22.1@765,1180.31 765,1140 730,1105 618.9,1105 565,1105 550,1090 v1(550,1080) 550,1010 550,840 550,760
  Top w32: 77.99,760 77.99,646.97 C8.+@164.96,560
  Top w40: 77.99,760 322,760
  Top w56: v1(80,580) v1(80,860) ; v1(80,860) 77.99,857.99 77.99,760 77.99,937.99 v1(80,940) ; v1(80,860) v1(80,900) v1(80,940) ; v1(80,860) v1(80,940)
  Bottom w10: v1(110,1830) 140,1860 270,1860 v1(310,1820) ; v1(270,1610) 290,1610 310,1630 v1(310,1820) ; v1(500,1840) 480,1820 v1(310,1820) ; v1(550,1080) 600,1130 v1(600,1170)
  Bottom w24: v1(110,1830) 110,970 v1(80,940) 150,1010 v1(320,1010)
  Bottom w56: v1(80,580) v1(80,620) v1(80,660) v1(80,940) v1(80,860)
FTDI_CLK: U6.P$62 U8.4 | length 525.8
  Top w10: v1(210,1830) 227.4,1812.6 U8.4@227.4,1781.18 ; v1(280,1530) 290,1520 290,1490 323.27,1456.73 U6.P$62@372.83,1456.73
  Bottom w10: v1(210,1830) 230,1810 230,1580 v1(280,1530)
FTDI_CS: U6.P$63 U8.5 | length 569.1
  Top w10: v1(170,1830) 190,1810 U8.5@190,1781.18 ; v1(260,1490) 312.95,1437.05 U6.P$63@372.83,1437.05
  Bottom w10: v1(170,1830) 170,1800 210,1760 210,1540 v1(260,1490)
FTDI_DATA: R31.2 U6.P$61 U8.3 | length 335.4
  Top w10: U8.3@227.4,1678.82 227.4,1657.4 209.69,1639.69 R31.2@209.69,1620 209.69,1590.31 240,1560 300,1560 310,1550 310,1500 333.58,1476.42 U6.P$61@372.83,1476.42
GND: C3.2 C4.2 C5.2 C6.2 C19.2 C20.2 C21.2 D1.C J1.3 J2.1 J3.2 J3.3 R8.1 R9.1 R10.1 R11.2 S2.P$2 U1.12 U1.30 U1.33 U1.34 U1.44 U2.2 U3.2 U5.9 U5.15 U7.2 U7.8 | length 1195
  Top w10: U7.8@981.1,665 1025,665 v1(1050,690) ; U5.15@981.1,1055 1035,1055 1050,1070 1050,1210 ; 1480,1030 1539.53,970.47 U1.44@1655.71,970.47 ; U1.34@1756.1,1169.29 1756.1,1216.1 1760,1220 ; 1770,1120 1760,1130 1760,1170 1760.71,1169.29 U1.33@1775.79,1169.29 ; 1770,1220 1775.79,1214.21 U1.33@1775.79,1169.29 ; 1775.79,1124.21 U1.33@1775.79,1169.29 ; 1830,1120 1834.84,1124.84 U1.30@1834.84,1169.29 1834.84,1125.16 ; v1(1980,660) C19.2@1980,700.31 ; v1(2220,1150) 2220,1140 2250,1110 U2.2@2278.82,1110 ; R8.1@2229.69,370 2229.69,429.69 v1(2230,430) 2229.69,430.32 R9.1@2229.69,470 ; R10.1@2229.69,570 2229.69,530.32 v1(2230,530) ; U3.2@2278.82,920 v1(2330,920) ; S2.P$2@2500,679 v1(2500,750)
  other v1: 2500,70 2430,90 2500,110 1150,150 2500,190 2430,210 2500,230 1060,340 2500,420 1340,710 1540,710 1970,800 1400,920 1890,990 1110,1000 1400,1080 1785,1360 2360,1400 2480,1400 1190,1480 1760,1500 2320,1590 2170,1600 1190,1630 1150,1850
GPIO0: J2.2 U1.29 U2.1 | length 2002.2
  Top w10: v1(1250,1340) J2.2@1250,1800 ; v1(1850,1250) 1854.53,1245.47 U1.29@1854.53,1169.29 1854.53,1094.53 v1(1890,1060) ; U2.1@2278.82,1147.4 2312.6,1147.4 2330,1130 2330,1050 2340,1040 v1(2340,1000)
  Bottom w10: v1(1250,1340) 1340,1250 v1(1850,1250) ; v1(1890,1060) 1920,1090 2170,1090 2210,1050 2210,1040 2250,1000 v1(2340,1000)
GPIO1: J2.4 U1.28 U2.3 | length 1701.5
  Top w10: v1(1350,1340) J2.4@1350,1800 ; v1(1890,1100) 1874.21,1115.79 U1.28@1874.21,1169.29 1874.21,1224.21 1910,1260 v1(1910,1300) ; v1(2260,1040) 2278.82,1058.82 U2.3@2278.82,1072.6
  Bottom w10: v1(1350,1340) 1390,1300 v1(1910,1300) ; v1(1890,1100) 1900,1110 2190,1110 v1(2260,1040)